# EAGLE board ppt4 (EAGLE 5.11)
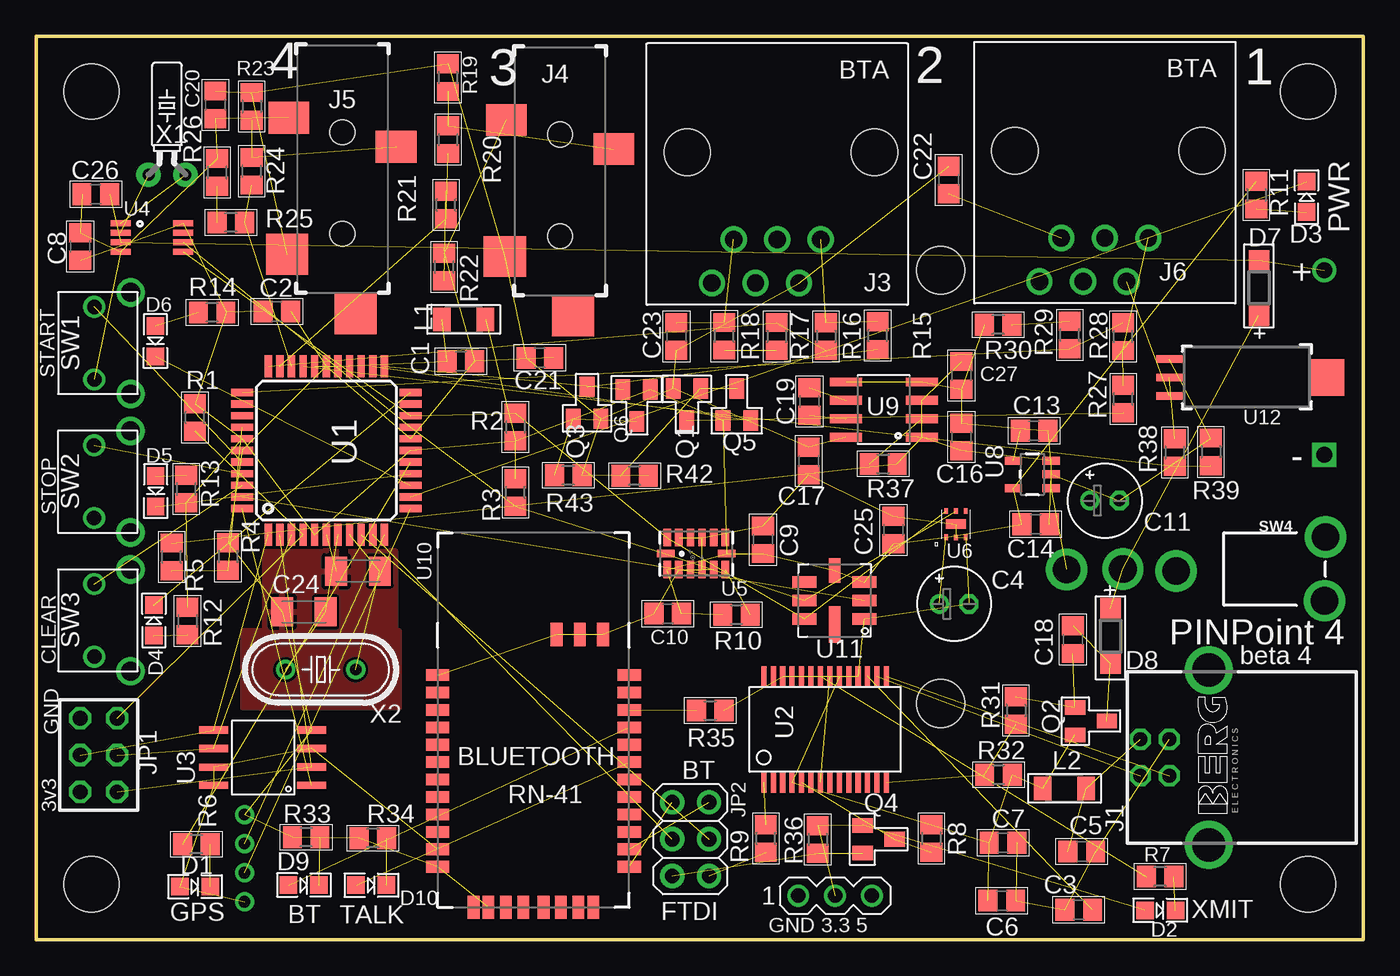
[diagram p0: board, top side]
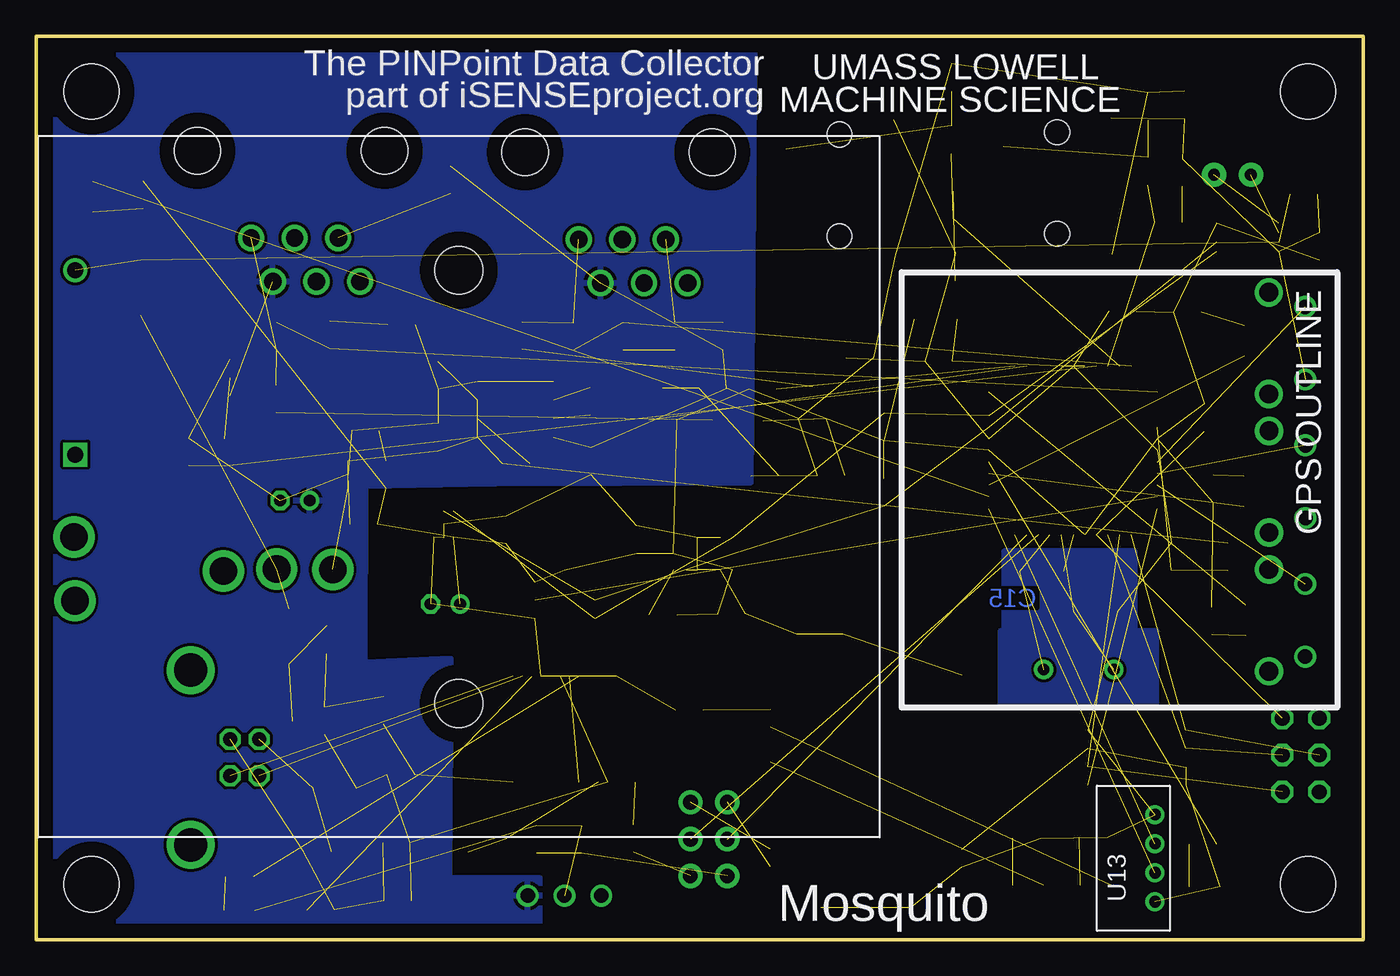
[diagram p1: board, bottom side, seen from below]

Size 91.44 x 62.23 mm. Coordinates in mm from the lower left corner, seen from the top.
Outline: 0,0 0,62.23 91.44,62.23 91.44,0 0,0
Copper layers (1*2+3*16): Top 0.035mm / dielectric 1.5mm / $gnd 0.035mm / dielectric 0.15mm / $+3v3 0.035mm / dielectric 0.2mm / Bottom 0.035mm
Design rules "default *": minimum track width 10mil, minimum drill 24mil, track to track 8mil, track to pad 8mil, pad to pad 8mil, via to via 8mil, smd to smd 8mil, copper to edge 40mil, drill to drill 8mil, minimum pad ring 10mil, minimum via ring 8mil, stop-mask expansion 4mil, vias tented up to drill 0mil, thermal gap 10mil
Net classes: 0 SIGNAL: width 0.203 mm, drill 0.203 mm, clearance 0.203 mm; 1 SUPPLY: width 0.356 mm, drill 0.203 mm, clearance 0.203 mm
Holes 3.81 mm at 3.81,3.81 3.81,58.42 87.63,3.81 87.63,58.42
tRestrict: area -0.2,-0.2 to 7.8,7.8; area -0.2,54.4 to 7.8,62.4; area 83.6,-0.2 to 91.6,7.8; area 83.6,54.4 to 91.6,62.4

## Footprints (pad centres in the part's own frame; a part is rotated, then mirrored left to right if it is on the bottom)
C0805 = smd 1.3 x 1.5: 1 -0.95,0; 2 0.95,0
E2-5 = drill 0.813 pad 1.27 round: + -1.016,0 | drill 0.813 pad 1.27 octagon: - 1.016,0
C1206K = smd 1.5 x 2: 1 -1.5,0; 2 1.5,0
LED-0805 = smd 1.2 x 1.2: A 0,-1.05; C 0,1.05
SOD123 = smd 1.4 x 1.4: A 1.9,0; C -1.9,0
PN61729-S = drill 0.95 octagon: 1 1.25,4.71; 2 -1.25,4.71; 3 -1.25,2.71; 4 1.25,2.71 | drill 2.3 pad 2.9 round: S1 -6.02,0; S2 6.02,0
DY164 = drill 1.2 round: 1 4.5,3; 2 3,0; 3 1.5,3; 4 0,0; 5 -1.5,3; 6 -3,0 | hole 3.2: 6.2,-6; -6.7,-6
SJ-3534-SMT = smd 2.2 x 2.8: 1 0,-3.7; 3 2,3.7 | smd 2.8 x 2.9: 2 9.4,-3.8; 10 13.5,0.9 | hole 1.7: 1,0; 8,0
2464R = drill 1.1 square: NEG 26.42,2.225 | drill 1.1 round: POS 26.42,14.925 | hole 3.3: 0,14.925; 0,-14.925
AVR-ISP-6 = drill 1.016 octagon: 2 -2.54,1.27; 3 0,-1.27; 4 0,1.27; 5 2.54,-1.27; 6 2.54,1.27 | drill 1 octagon: P$1 -2.54,-1.27
2X03 = drill 1.016 pad 1.676 round: 2 -2.54,1.27; 3 0,-1.27; 4 0,1.27; 5 2.54,-1.27; 6 2.54,1.27 | drill 1 pad 1.676 round: P$2 -2.54,-1.27
L3216C = smd 1.2 x 1.6: 1 -1.5,0; 2 1.5,0
SUPER-SOT3 = smd 1 x 1.4: 1 -0.95,-1.1; 2 0.95,-1.1; 3 0,1.1
SOT23 = smd 1 x 1.4: 1 -0.95,-1.1; 2 0.95,-1.1; 3 0,1.1
R0805 = smd 1.3 x 1.5: 1 -0.95,0; 2 0.95,0
PTS635V = drill 1 round: 1 -2.5,0; 2 2.5,0 | drill 1.3 round: P$1 -3.5,2.5; P$2 3.5,2.5
102-1271-EV = drill 1.9 round: 1 -0.14,10.28; 2 0,13.96; 3 -0.03,17.82; P$1 2.2,0; P$2 -2.19,0.05
MA03-1 = drill 1 round: P$1 -2.54,0; P$2 0,0; P$3 2.54,0
TQFP44 = smd 1.5 x 0.5: 1 -5.8,4; 2 -5.8,3.2; 3 -5.8,2.4; 4 -5.8,1.6; 5 -5.8,0.8; 6 -5.8,0; 7 -5.8,-0.8; 8 -5.8,-1.6; 9 -5.8,-2.4; 10 -5.8,-3.2; 11 -5.8,-4; 23 5.8,-4; 24 5.8,-3.2; 25 5.8,-2.4; 26 5.8,-1.6; 27 5.8,-0.8; 28 5.8,0; 29 5.8,0.8; 30 5.8,1.6; 31 5.8,2.4; 32 5.8,3.2; 33 5.8,4 | smd 0.5 x 1.5: 12 -4,-5.8; 13 -3.2,-5.8; 14 -2.4,-5.8; 15 -1.6,-5.8; 16 -0.8,-5.8; 17 0,-5.8; 18 0.8,-5.8; 19 1.6,-5.8; 20 2.4,-5.8; 21 3.2,-5.8; 22 4,-5.8; 34 4,5.8; 35 3.2,5.8; 36 2.4,5.8; 37 1.6,5.8; 38 0.8,5.8; 39 0,5.8; 40 -0.8,5.8; 41 -1.6,5.8; 42 -2.4,5.8; 43 -3.2,5.8; 44 -4,5.8
SSOP28DB = smd 0.348 x 1.397: 1 -4.225,-3.656; 2 -3.575,-3.656; 3 -2.925,-3.656; 4 -2.275,-3.656; 5 -1.625,-3.656; 6 -0.975,-3.656; 7 -0.325,-3.656; 8 0.325,-3.656; 9 0.975,-3.656; 10 1.625,-3.656; 11 2.275,-3.656; 12 2.925,-3.656; 13 3.575,-3.656; 14 4.225,-3.656; 15 4.225,3.656; 16 3.575,3.656; 17 2.925,3.656; 18 2.275,3.656; 19 1.625,3.656; 20 0.975,3.656; 21 0.325,3.656; 22 -0.325,3.656; 23 -0.975,3.656; 24 -1.625,3.656; 25 -2.275,3.656; 26 -2.925,3.656; 27 -3.575,3.656; 28 -4.225,3.656
WSON = smd 2 x 0.5: CE# -3.29,1.595; HOLD# 3.46,0.345; SCK 3.46,-0.945; SI 3.46,-2.215; SO -3.29,0.325; VDD 3.46,1.595; VSS -3.29,-2.215; WP# -3.29,-0.945
UMAX-8 = smd 1.35 x 0.4: P$1 -2.15,0.975; P$2 -2.15,0.325; P$3 -2.15,-0.325; P$4 -2.15,-0.975; P$5 2.15,-0.975; P$6 2.15,-0.325; P$7 2.15,0.325; P$8 2.15,0.975
LGA14 = smd 0.5 x 1.2: 1 2,1.1; 2 1.2,1.1; 3 0.4,1.1; 4 -0.4,1.1; 5 -1.2,1.1; 6 -2,1.1; 8 -2,-1.1; 9 -1.2,-1.1; 10 -0.4,-1.1; 11 0.4,-1.1; 12 1.2,-1.1; 13 2,-1.1 | smd 1.2 x 0.5: 7 -2.1,0; 14 2.1,0
MAX44007 = smd 0.25 x 0.4: P1 -0.675,-0.9; P2 0,-0.925; P3 0.675,-0.9; P4 0.675,0.9; P5 0,0.9; P6 -0.675,0.9 | smd 1.35 x 0.65: PGND 0,0
SOT23-5 = smd 0.55 x 1.2: 1 -0.95,-1.3; 2 0,-1.3; 3 0.95,-1.3; 4 0.95,1.3; 5 -0.95,1.3
SO08 = smd 0.61 x 2.21: 1 -1.905,-2.616; 2 -0.635,-2.616; 3 0.635,-2.616; 4 1.905,-2.616; 5 1.905,2.616; 6 0.635,2.616; 7 -0.635,2.616; 8 -1.905,2.616
RN41 = smd 0.8 x 1.6: 1 -6.6,-6.6; 2 -5.4,-6.6; 3 -4.2,-6.6; 4 -3,-6.6; 5 -1.8,-6.6; 6 -0.6,-6.6; 7 0.6,-6.6; 8 1.8,-6.6; 9 3,-6.6; 10 4.2,-6.6; 11 5.4,-6.6; 12 6.6,-6.6; 13 6.6,6.6; 14 5.4,6.6; 15 4.2,6.6; 16 3,6.6; 17 1.8,6.6; 18 0.6,6.6; 19 -0.6,6.6; 20 -1.8,6.6; 21 -3,6.6; 22 -4.2,6.6; 23 -5.4,6.6; 24 -6.6,6.6 | smd 1.6 x 0.8: 25 -9.4,4.8; 26 -9.4,3.2; 27 -9.4,1.6; 28 9.4,3.1; 29 9.4,-3.1; 30 9.4,-4.122; 31 9.4,-1.9; 32 9.4,-0.7; 33 9.4,0.7; 34 9.4,1.9; 35 9.4,4.122
BMP085 = smd 1.67 x 0.8: 1 -2.065,1.27; 2 -2.065,0; 3 -2.065,-1.27; 5 2.065,-1.27; 6 2.065,0; 7 2.065,1.27 | smd 0.8 x 1.67: 4 0,-2.065 | smd 0.8 x 2.5: 8 0,1.65
HIH-4030 = smd 0.508 x 1.778: 1 -1.27,-5.08; 2 0,-5.08; 3 1.27,-5.08 | smd 2.54 x 2.286: NC 0,5.842
DF3A-4P-BACK = drill 0.8 round: P$1 3,0; P$2 1,0; P$3 -1,0; P$4 -3,0
TC26H = drill 0.813 pad 1.676 round: 1 -1.27,0; 2 1.27,0
HC49U-V = drill 0.813 round: 1 -2.413,0; 2 2.413,0

## Placement (x,y rotation side)
C1  0.1uF  [C0805]  29.26,39.84 0 top
C2  0.1uF  [C0805]  16.58,43.27 0 top
C3  0.1uF  [C0805]  71.84,2.07 180 top
C4  100uF  [E2-5]  63.25,23.12 0 top
C5  0.01uF  [C0805]  72.05,6.07 0 top
C6  4.7uF  [C0805]  66.54,2.69 0 top
C7  0.1uF  [C0805]  66.62,6.68 0 top
C8  0.1uF  [C0805]  3.03,47.75 90 top
C9  1uF tantalum  [C0805]  50.08,27.55 90 top
C10  0.1uF  [C0805]  43.52,22.46 180 top
C11  100uF  [E2-5]  73.62,30.25 0 top
C13  470pF  [C0805]  68.76,35.06 0 top
C14  2.2uF (587-2724-1-ND)  [C0805]  68.87,28.61 0 top
C15  18pF  [C1206K]  22.17,25.39 180 top
C16  1uF  [C0805]  63.75,34.62 90 top
C17  10uF (587-1304-1-ND)  [C0805]  53.23,32.98 270 top
C18  1uF  [C0805]  71.43,20.66 90 top
C19  1uF (587-1283-1-ND)  [C0805]  53.27,37.07 90 top
C20  0.1uF  [C0805]  12.34,57.51 270 top
C21  0.1uF  [C0805]  34.7,40.08 0 top
C22  0.1uF  [C0805]  62.88,52.33 270 top
C23  0.1uF  [C0805]  44.11,41.55 90 top
C24  18pF  [C1206K]  18.44,22.58 180 top
C25  0.1uF  [C0805]  59.07,28.23 90 top
C26  10uF  [C0805]  4.1,51.34 180 top
C27  2.2uF (587-2724-1-ND)  [C0805]  63.75,38.88 270 top
D1  GREEN 2 mA 0805  [LED-0805]  10.94,3.65 270 top
D2  YELLOW 2 mA 0805  [LED-0805]  77.45,2.02 270 top
D3  GREEN 2 mA 0805  [LED-0805]  87.54,51.17 0 top
D4  RED 2 mA 0805  [LED-0805]  8.1,22 0 top
D5  YELLOW 2 mA 0805  [LED-0805]  8.23,30.89 180 top
D6  GREEN 2 mA 0805  [LED-0805]  8.21,41.22 180 top
D7  MBR0520L  [SOD123]  84.25,44.91 90 top
D8  MBR0520L  [SOD123]  74.03,20.91 270 top
D9  YELLOW 2 mA 0805  [LED-0805]  18.43,3.76 270 top
D10  GREEN 2 mA 0805  [LED-0805]  23.08,3.75 270 top
J1  Digikey WM17113-ND  [PN61729-S]  80.8,12.55 90 top
J3  BTA  [DY164]  51.06,48.23 180 top
J4  SJ-3524-SMT  [SJ-3534-SMT]  36.08,56.46 270 top
J5  SJ-3524-SMT  [SJ-3534-SMT]  21.1,56.62 270 top
J6  BTA  [DY164]  73.63,48.34 180 top
J7  2464  [2464R]  62.33,31.19 0 top
JP1  AVR-ISP-6  [AVR-ISP-6]  4.3,12.72 90 top
JP2  [2X03]  45.09,6.93 90 top
L1  10uH CBC3225T100MR 1210 pkg  [L3216C]  29.45,42.73 180 top
L2  10uH CBC3225T100MR 1210 pkg  [L3216C]  70.86,10.42 0 top
Q1  NDS332P  [SUPER-SOT3]  44.84,36.87 180 top
Q2  NDS332P  [SUPER-SOT3]  72.68,15.06 270 top
Q3  NDS332P  [SUPER-SOT3]  37.95,36.98 0 top
Q4  BSS128  [SOT23]  58.05,6.92 270 top
Q5  BSS123  [SOT23]  48.27,36.87 0 top
Q6  BSS123  [SOT23]  41.37,36.81 180 top
R1  10K  [R0805]  10.94,35.97 90 top
R2  10K  [R0805]  33.01,35.31 270 top
R3  10K  [R0805]  33.02,30.81 90 top
R4  47K  [R0805]  13.21,26.4 270 top
R5  47K  [R0805]  9.32,26.37 90 top
R6  1K  [R0805]  11.03,6.57 180 top
R7  1K  [R0805]  77.43,4.35 180 top
R8  10K  [R0805]  61.68,6.97 270 top
R9  10K  [R0805]  50.27,6.97 90 top
R10  50  [R0805]  48.25,22.38 180 top
R11  1K  [R0805]  84.08,51.28 270 top
R12  1K  [R0805]  10.42,21.95 270 top
R13  1K  [R0805]  10.34,31.04 90 top
R14  1K  [R0805]  12.12,43.2 180 top
R15  47K  [R0805]  57.98,41.61 90 top
R16  47K  [R0805]  54.42,41.55 270 top
R17  47K  [R0805]  51.02,41.56 270 top
R18  47K  [R0805]  47.41,41.57 90 top
R19  47K  [R0805]  28.36,59.38 270 top
R20  47K  [R0805]  28.37,55.11 270 top
R21  47K  [R0805]  28.23,50.61 90 top
R22  47K  [R0805]  28.11,46.33 90 top
R23  47K  [R0805]  14.85,57.41 270 top
R24  47K  [R0805]  14.84,52.93 270 top
R25  47K  [R0805]  13.42,49.4 180 top
R26  47K  [R0805]  12.47,52.86 90 top
R27  47K  [R0805]  74.9,37.24 90 top
R28  47K  [R0805]  74.89,41.54 90 top
R29  47K  [R0805]  71.21,41.65 90 top
R30  47K  [R0805]  66.28,42.36 180 top
R31  1K  [R0805]  67.51,15.78 270 top
R32  10K  [R0805]  66.3,11.36 180 top
R33  1K  [R0805]  18.6,7.06 180 top
R34  1K  [R0805]  23.18,6.99 180 top
R35  10K  [R0805]  46.44,15.79 0 top
R36  10K  [R0805]  53.85,6.91 270 top
R37  100K  [R0805]  58.37,32.77 0 top
R38  47K  [R0805]  78.46,33.56 90 top
R39  47K  [R0805]  80.95,33.61 270 top
R42  10K  [R0805]  41.23,31.96 180 top
R43  10K  [R0805]  36.65,31.99 180 top
SW1  PTS635V  [PTS635V]  4,41.09 270 top
SW2  PTS635V  [PTS635V]  3.99,31.55 270 top
SW3  PTS635V  [PTS635V]  4,22 270 top
SW4  EG2480  [102-1271-EV]  88.83,25.53 90 top
TP1  [MA03-1]  55.04,3.03 0 top
U1  ATMEGA324PV-10AU  [TQFP44]  19.99,33.7 90 top
U2  FT232RL  [SSOP28DB]  54.36,14.48 0 top
U3  SST25VF016BTRUE  [WSON]  15.7,12.23 180 top
U4  DS1340U-33+  [UMAX-8]  7.97,48.37 0 top
U5  ADXL345  [LGA14]  45.48,26.6 180 top
U6  MAX44007  [MAX44007]  63.38,28.62 0 top
U8  MIC5205-3.3YM5  [SOT23-5]  68.63,32.06 90 top
U9  MAX682  [SO08]  58.4,36.52 90 top
U10  BLUETOOTH-RN41"  [RN41]  34.26,11.63 270 top
U11  BMP085  [BMP085]  55.01,23.37 180 top
U12  HIH-4031SMD  [HIH-4030]  83.16,38.72 270 top
U13  LS20031  [DF3A-4P-BACK]  14.34,5.61 270 top
X1  32.768 kHz 12.5 pF X1123-ND  [TC26H]  9.01,52.69 0 top
X2  9.216 MHZ 18PF  [HC49U-V]  19.61,18.61 180 top

## Library data of the parts
C1-C3 C5-C10 C13-C27 L1 L2 R1-R39 R42 R43 = rcl
C4 C11 = resistor
D1-D6 D9 D10 JP1 SW1-SW4 U3 U13 = machine_science
D7 D8 = diode
J1 = con-berg
J3-J7 U6 = machine_science2
JP2 = pinhead
Q1-Q3 = transistor-power
Q4-Q6 = transistor-small-signal
TP1 = con-lstb
U1 = atmel
U2 = SparkFunEagle-6-6-07
U4 U5 U8 U10 X1 = SparkFun
U9 = max682
U11 U12 = SparkFun-20100301
X2 = crystal

## Nets
+3V3 [SUPPLY]: C2.1 C4.+ C8.1 C9.1 C10.1 C14.1 C25.1 D1.A D2.A JP1.2 L1.1 Q4.1 Q5.1 Q6.1 R1.2 R2.2 R3.2 R10.2 R11.1 R12.1 R13.1 R14.1 R36.1 TP1.P$2 U1.5 U1.17 U1.38 U3.HOLD# U3.VDD U3.WP# U4.P$8 U5.1 U5.7 U6.P1 U8.5 U10.11 U11.3 U11.4 U13.P$1
+5V [SUPPLY]: C11.+ C17.1 C20.1 C21.1 C22.1 C23.1 J3.5 J4.2 J5.2 J6.5 Q1.2 Q3.2 R19.1 R23.1 R42.1 R43.1 TP1.P$3 U9.8 U12.3
ADX1: R28.2 R29.1 U1.34
ADX1-PULLUP: Q5.2 U1.24
ADX2: R16.2 R17.1 U1.33
ADX2-PULLUP: Q6.2 U1.23
ADX3: R20.2 R21.1 U1.32
ADX4: R24.2 R25.1 U1.31
ATM-RX0: JP2.3 U1.9
ATM-TX0: JP2.4 U1.10
BATT-LED: D3.C U1.13
CLEAR-BUTTON: SW3.1 U1.42
CLEAR-LED: D4.C U1.22
CS: U1.44 U3.CE#
EOC: U1.43 U11.2
FTDI-RX: JP2.2 Q4.2 R36.2
FTDI-TX: JP2.P$2 R9.1
FTDI-VCC [SUPPLY]: C6.1 C7.1 L2.1 Q2.2 R8.1 R32.1 U2.4 U2.20
GND [SUPPLY]: C1.2 C2.2 C3.2 C4.- C5.2 C6.2 C7.2 C8.2 C9.2 C10.2 C11.- C13.2 C14.2 C15.2 C16.2 C17.2 C20.2 C21.2 C22.2 C23.2 C24.2 C25.2 C26.2 C27.2 J1.4 J3.2 J4.1 J5.1 J6.2 J7.NEG JP1.6 R4.1 R18.2 R22.2 R26.2 R30.2 R33.2 R34.2 R35.2 R39.1 SW1.2 SW2.2 SW3.2 TP1.P$1 U1.6 U1.18 U1.28 U1.39 U2.7 U2.18 U2.21 U2.25 U2.26 U3.VSS U4.P$4 U5.2 U5.4 U5.5 U5.10 U5.12 U6.P2 U6.P3 U6.PGND U8.2 U9.4 U9.5 U10.1 U10.12 U10.25 U10.26 U10.27 U10.28 U10.29 U11.1 U12.1 U13.P$4
GPS-LED: R6.2 U1.16
HUMIDITY: R38.1 R39.2 U1.30
MISO: JP1.P$1 U1.2 U3.SO
MOSI: JP1.4 U1.1 U3.SI
N$1: J1.2 U2.16
N$2: J1.3 U2.15
N$3: C1.1 L1.2 U1.27 U1.29
N$4: R38.2 U12.2
N$5: D9.C R33.1
N$6: D3.A R11.2
N$7 [SUPPLY]: C5.1 J1.1 L2.2
N$8 [SUPPLY]: D1.C R6.1
N$9: R7.2 U2.22
N$10 [SUPPLY]: D2.C R7.1
N$11: Q4.3 R8.2 U2.5
N$12: R9.2 U2.1
N$13 [SUPPLY]: C3.1 U2.17
N$14: U4.P$1 X1.2
N$15: U4.P$2 X1.1
N$16: D4.A R12.2
N$17: D5.A R13.2
N$18: D6.A R14.2
N$19: J3.6 R15.2 R16.1
N$20: J6.6 R27.2 R28.1
N$21: R17.2 R18.1
N$22: J4.3 R19.2 R20.1
N$23: R29.2 R30.1
N$24: R21.2 R22.1
N$25: J5.3 R23.2 R24.1
N$26: C13.1 U8.4
N$27: R25.2 R26.1
N$28 [SUPPLY]: C19.1 U9.7
N$29 [SUPPLY]: C18.1 Q2.1 R31.1
N$30 [SUPPLY]: C19.2 U9.6
N$31 [SUPPLY]: C18.2 D8.A Q2.3
N$32: Q1.3 R27.1
N$33: C24.1 U1.7 X2.2
N$34: R37.1 U9.2
N$35: C15.1 U1.8 X2.1
N$36: D9.A U10.21
N$37: D10.C R34.1
N$38: D10.A U10.19
N$39: R35.1 U10.22
N$40: Q1.1 Q5.3 R42.2
N$41: Q3.3 R15.1
N$42: Q3.1 Q6.3 R43.2
N$44: R10.1 U5.6
PWREN~ [SUPPLY]: R31.2 R32.2 U2.14
RST: JP1.5 R1.1 U1.4
RX1: U1.11 U13.P$3
RX-BT: JP2.5 U10.14
SCK: JP1.3 U1.3 U3.SCK
SCL: R3.1 U1.19 U4.P$6 U5.14 U6.P5 U11.6
SDA: R2.1 U1.20 U4.P$5 U5.13 U6.P6 U11.7
START-BUTTON: SW1.1 U1.40
START-LED: D6.C U1.14
STOP-BUTTON: SW2.1 U1.41
STOP-LED: D5.C U1.15
TX1: U1.12 U13.P$2
TX-BT: JP2.6 U10.13
UNSWPWR [SUPPLY]: D7.C D8.C SW4.2
VBATT [SUPPLY]: C26.1 D7.A J7.POS U4.P$3
VINPUT [SUPPLY]: C16.1 C27.1 R5.2 R37.2 SW4.3 U8.1 U8.3 U9.1 U9.3
VOLT: R4.2 R5.1 U1.37

## Tracks (layer width: path | path; a pad name or v marks a point on that pad's centre or on a via)
+3V3  (35 unrouted)
+5V  (15 unrouted)
  pour Bottom: 41.96,62.24 42.21,31.48 59.88,31.41 68.78,31.24 68.81,19.13 62.9,19.38 63,4.25 56.75,4.25 56.75,0 91.26,0 91.26,62.24
ADX1  (2 unrouted)
ADX1-PULLUP  (1 unrouted)
ADX2  (2 unrouted)
ADX2-PULLUP  (1 unrouted)
ADX3  (2 unrouted)
ADX4  (2 unrouted)
ATM-RX0  (1 unrouted)
ATM-TX0  (1 unrouted)
BATT-LED  (1 unrouted)
CLEAR-BUTTON  (1 unrouted)
CLEAR-LED  (1 unrouted)
CS  (1 unrouted)
EOC  (1 unrouted)
FTDI-RX  (2 unrouted)
FTDI-TX  (1 unrouted)
FTDI-VCC  (7 unrouted)
GND  (63 unrouted)
  pour Top: 15.75,26.75 15.75,21.25 14.25,21.25 14.25,16 25,16 25,21.25 24.75,21.25 24.75,26.75
  pour Bottom: 15.75,26.75 24.75,26.75 24.75,21.25 25,21.25 25,16 14.25,16 14.25,21.25 15.75,21.25
GPS-LED  (1 unrouted)
HUMIDITY  (2 unrouted)
MISO  (2 unrouted)
MOSI  (2 unrouted)
N$1  (1 unrouted)
N$2  (1 unrouted)
N$3  (3 unrouted)
N$4  (1 unrouted)
N$5  (1 unrouted)
N$6  (1 unrouted)
N$7  (2 unrouted)
N$8  (1 unrouted)
N$9  (1 unrouted)
N$10  (1 unrouted)
N$11  (2 unrouted)
N$12  (1 unrouted)
N$13  (1 unrouted)
N$14  (1 unrouted)
N$15  (1 unrouted)
N$16  (1 unrouted)
N$17  (1 unrouted)
N$18  (1 unrouted)
N$19  (2 unrouted)
N$20  (2 unrouted)
N$21  (1 unrouted)
N$22  (2 unrouted)
N$23  (1 unrouted)
N$24  (1 unrouted)
N$25  (2 unrouted)
N$26  (1 unrouted)
N$27  (1 unrouted)
N$28  (1 unrouted)
N$29  (2 unrouted)
N$30  (1 unrouted)
N$31  (2 unrouted)
N$32  (1 unrouted)
N$33  (2 unrouted)
N$34  (1 unrouted)
N$35  (2 unrouted)
N$36  (1 unrouted)
N$37  (1 unrouted)
N$38  (1 unrouted)
N$39  (1 unrouted)
N$40  (2 unrouted)
N$41  (1 unrouted)
N$42  (2 unrouted)
N$44  (1 unrouted)
PWREN~  (2 unrouted)
RST  (2 unrouted)
RX1  (1 unrouted)
RX-BT  (1 unrouted)
SCK  (2 unrouted)
SCL  (5 unrouted)
SDA  (5 unrouted)
START-BUTTON  (1 unrouted)
START-LED  (1 unrouted)
STOP-BUTTON  (1 unrouted)
STOP-LED  (1 unrouted)
TX1  (1 unrouted)
TX-BT  (1 unrouted)
UNSWPWR  (2 unrouted)
VBATT  (3 unrouted)
VINPUT  (8 unrouted)
VOLT  (2 unrouted)
(copper drawn outside any net)
  shapes: $+3v3 area x1, $gnd area x2

## Text on the board
tPlace: 2 | 3 | 1 | 4 | PWR | START | STOP | U10 | CLEAR | PINPoint 4 | beta 4 | GND | BLUETOOTH | RN-41 | BT | JP2 | 3v3 | BT | TALK | GPS | FTDI | XMIT | GND 3.3 5
bPlace: The PINPoint Data Collector | UMASS LOWELL | part of iSENSEproject.org | MACHINE SCIENCE | GPS OUTLINE | Mosquito